# Altium PCB Valve.PcbDoc
Units mm, origin at the board's own origin, x right, y up, seen from the top; angles counter-clockwise.
Board outline 50 x 15.75 mm, 2 copper layers (Top Layer, Bottom Layer); 5 components, 6 nets, 22 pads, 0 vias.
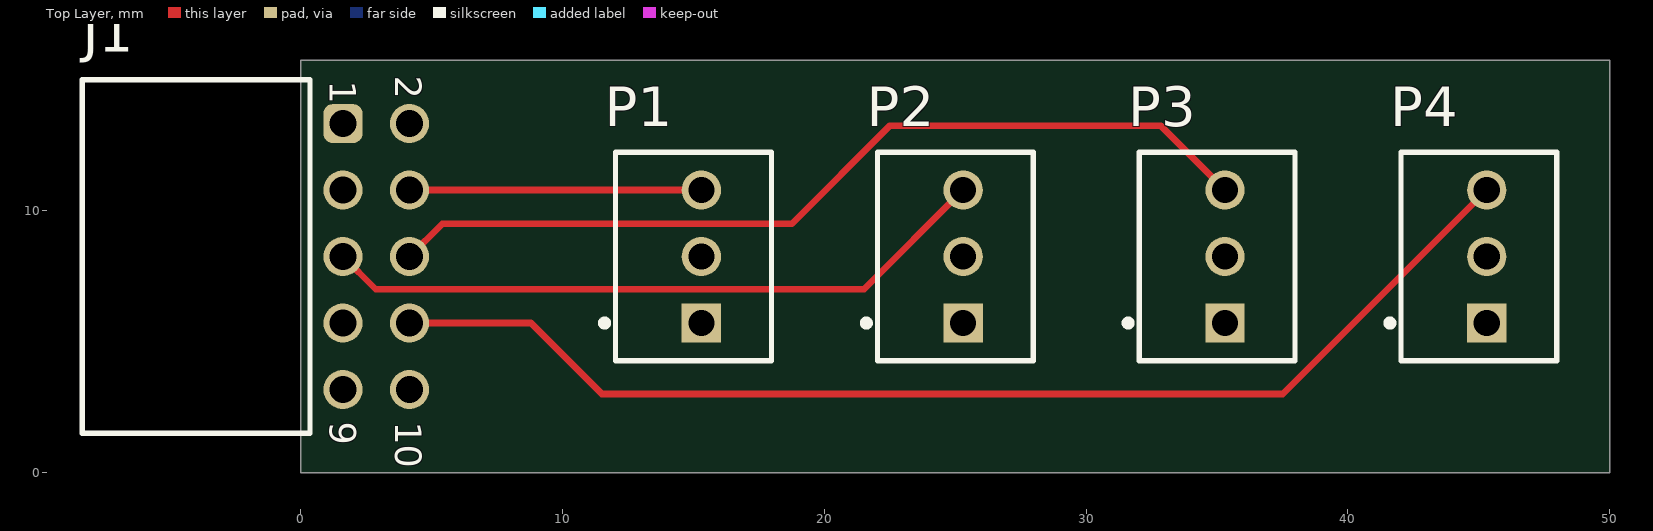
[diagram p0: Top Layer view]
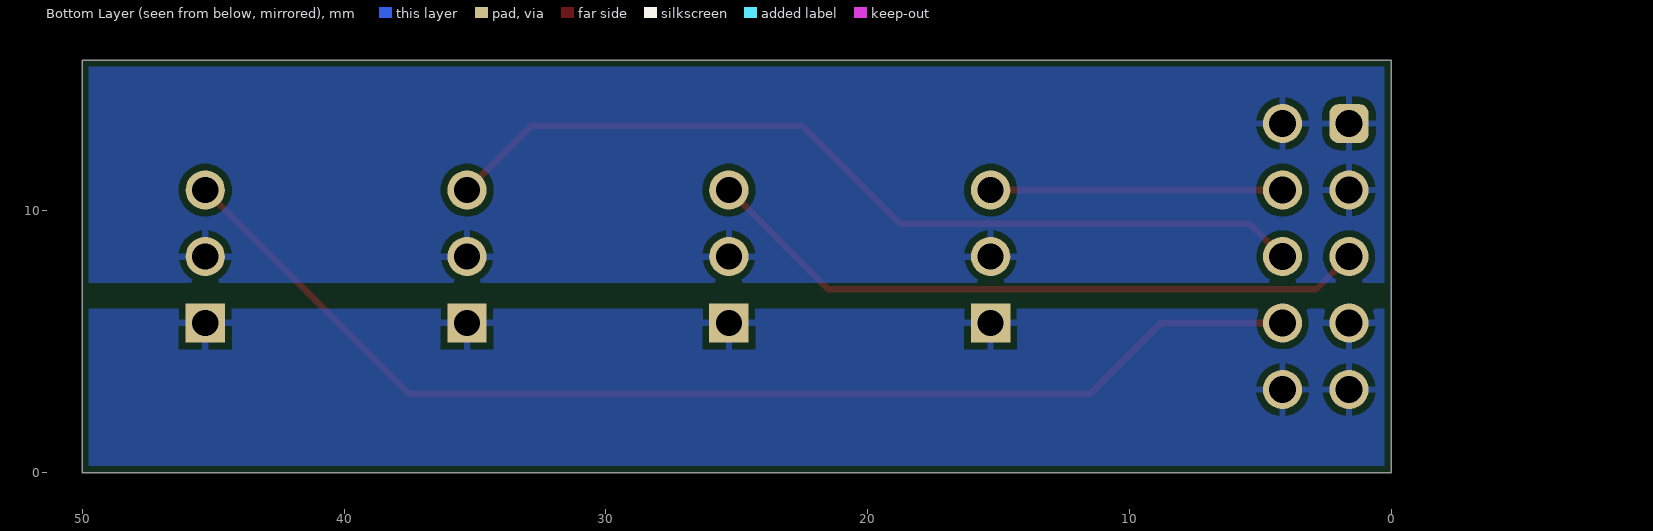
[diagram p1: Bottom Layer view, seen from below]
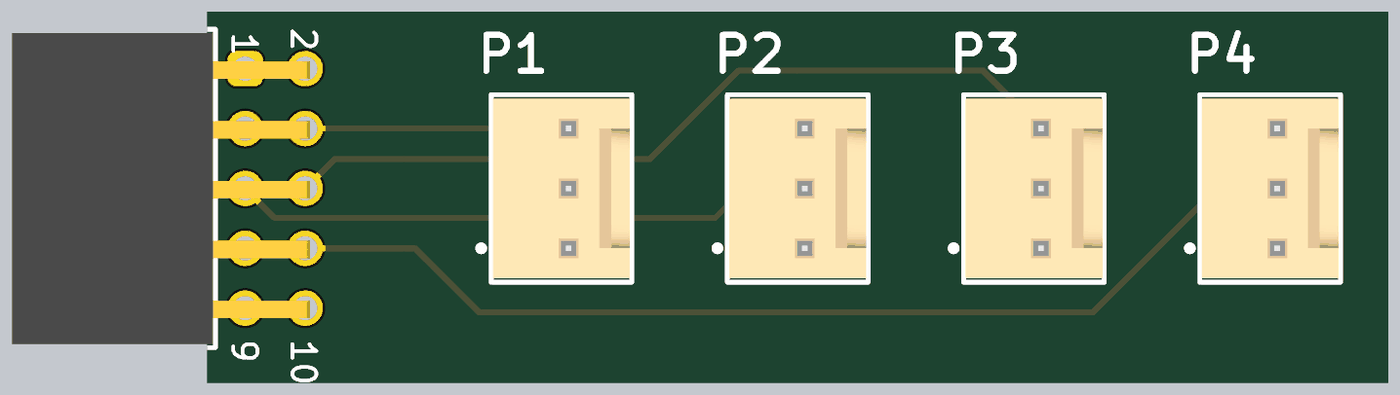
[diagram p2: 3D render of the assembled board from above, using the file's embedded part models]

## Layer stack, top to bottom
Top Solder: solder mask 0.0102, Solder Resist, Dk 3.5
Top Layer: signal copper 0.0356
Dielectric 1: dielectric 0.32, FR-4, Dk 4.8
Bottom Layer: signal copper 0.0356
Bottom Solder: solder mask 0.0102, Solder Resist, Dk 3.5

## Board outline
0,0 0,15.75 50,15.75 50,0

## Design rules (kind name [scope] priority, off if disabled: settings)
BoardOutlineClearance [All] p1: gap=0.254 ignorepadtopadclearanceinfootprint=FALSE except(0: Arc-SplitContinuation Track-SplitContinuation SMDPad-SplitContinuation THPad-SplitContinuation Via-SplitContinuation Fill-SplitContinuation Poly-SplitContinuation Region-SplitContinuation Text-SplitContinuation)
Clearance [All] p1: gap=0.254 ignorepadtopadclearanceinfootprint=FALSE except(0: Arc-Hole Track-Hole SMDPad-Hole THPad-Hole Via-Hole Fill-Hole Poly-Hole Region-Hole Text-Hole)
PolygonConnect [All] p1: connectstyle=Relief reliefconductorwidth=0.254 reliefentries=4 polygonreliefangle="90 Angle" airgapwidth=0.254
RoutingVias [All] p1: holewidth=0.711 width=1.27 viastyle="Through Hole" minholewidth=0.711 minwidth=1.27 maxholewidth=0.711 maxwidth=1.27
SolderMaskExpansion [All] p1: expansion=0.102 istentingtop=FALSE
Width [All] p1: maxlimit=0.254 minlimit=0.254 preferedwidth=0.254
30 further rules are at their usual default settings.

## Components (designator, comment, footprint, x,y, rotation, side; value= is the part's Value field where it differs from the comment)
J1 "613010243121" 613010243121 -4,8.25 r270 top
P1 "61900311121" 61900311121 15,8.25 r270 top
P2 "61900311121" 61900311121 25,8.25 r270 top
P3 "61900311121" 61900311121 35,8.25 r270 top
P4 "61900311121" 61900311121 45,8.25 r270 top

## Footprints (in the part's own frame and the unit in brackets; to place one, negate y for a bottom-side part, rotate by r counter-clockwise, add the part's x,y. Pads: shape width x height; smd on the part's side, far side on the other; paste and mask are expansions set on the pad)
61900311121 [mm] "2.54mm Male Locking Header, 3p"
  rect 1.5x1.5 hole 1: 1(2.54,0.3)
  round 1.5 hole 1: 2(0,0.3) 3(-2.54,0.3)
  silkscreen extent -3.98,-3.52 3.98,2.98, body extent -3.81,-2.9 3.81,2.9, height 11.53
613010243121 [mm] "Socket Header, Pitch 2.54 mm, THT, Angled, dual row, 10p"
  rrect50% 1.5x1.5 hole 1.03: 1(-5.08,5.61)
  round 1.5 hole 1.03: 2(-5.08,8.15) 3(-2.54,5.61) 4(-2.54,8.15) 5(0,5.61) 6(0,8.15) 7(2.54,5.61) 8(2.54,8.15) 9(5.08,5.61) 10(5.08,8.15)
  silkscreen extent -6.75,-4.35 6.75,4.35, body extent -6.6,-4.25 6.6,8.35, height 5.05

## Part data
J1: "WR-PHD Socket Header, THT, pitch 2.54mm, Dual Row, Angled, 10p", Contact Resistance=20mOhm, Manufacturer="Wurth Elektronik", Operating Temperature="-40 to +125degC", Rated Current=3A, Withstanding Voltage=500VAC, Working Voltage=250VAC, ComponentLink1Description=Manufacturer, ComponentLink1URL=http://www.we-online.de, ComponentLink2Description=Datasheet, ComponentLink2URL=https://www.we-online.com/catalog/datasheet/613010243121.pdf, Gender="Socket Header", Manufacturer Part Number=613010243121, Mounting Technology=THT, Orientation=Angled, Packaging=Tray, Pin Number=10, Pitch=2.54mm, Row Number=Dual
P1 P2 P3 P4: "WR-WTB THT Male Vertical Locking Header, pitch 2.54mm, 3p", Contact Resistance=20mOhm, Operating Temperature="-40 to +105degC", Rated Current=3A, Withstanding Voltage=1000VAC, Working Voltage=250VAC, ComponentLink1Description=Manufacturer, ComponentLink1URL=http://www.we-online.de, ComponentLink2Description=Datasheet, ComponentLink2URL=https://www.we-online.com/catalog/datasheet/61900311121.pdf, Gender=Male, Mounting Technology=THT, Packaging=Bag, Part Number=61900311121, Pin Number=3, Pitch=2.54mm, Published Date="January 2020", Publisher="Wurth Elektronik", Type=Vertical

## Nets (pads, with @x,y where several pads share a name; then routed paths per layer and width w, separated by ;. In a path a pad name is that pad's centre, name@x,y a point inside that pad or via, vN(x,y) a via of type N, cw(c..) or ccw(c..) an arc to the next point about the centre after c; other vN are vias at no path point)
7V: J1.1 J1.2 J1.3 P1.2 P2.2 P3.2 P4.2
GND: J1.7 J1.9 J1.10 P1.1 P2.1 P3.1 P4.1
VALVE5: J1.4 P1.3 | length 11.2
  Top Layer w0.254: J1.4 P1.3
VALVE6: J1.5 P2.3 | length 25.8
  Top Layer w0.254: J1.5 2.86,7 21.51,7 P2.3
VALVE7: J1.6 P3.3 | length 34.2
  Top Layer w0.254: J1.6 5.4,9.5 18.75,9.5 22.5,13.25 32.84,13.25 P3.3
VALVE8: J1.8 P4.3 | length 45.5
  Top Layer w0.254: J1.8 8.79,5.71 11.5,3 37.51,3 P4.3

## Polygon pours and split planes (outlines as drawn)
7V on Bottom Layer "7V_L02_P001" (solid, pour order 1): 0,15.75 0,7.25 51,7.25 51,15.75
GND on Bottom Layer "GND_L02_P000" (solid, pour order 0): 0,0 51,0 51,6.25 0,6.25

## Silkscreen, mask and mechanical layers (free items; w line width, h text height)
Mechanical 1:
  the board outline again, w0.254

## Text inside footprints (layer, text, board x,y; h text height)
J1: Top Overlay "9" at 1.1,1.94 h1.02 r270; Top Overlay "10" at 3.6,1.94 h1.02 r270; Top Overlay "2" at 3.6,15.16 h1.02 r270; Top Overlay "1" at 1.1,14.96 h1.02 r270